# Altium PCB PCB.PcbDoc (part 2 of 2)
Units mm, origin at the board's own origin, x right, y up, seen from the top; angles counter-clockwise.
Board outline 100 x 50 mm, 4 copper layers (Top Layer, Vdd, GND, Bottom Layer), stack 0.603 mm thick; 99 components, 96 nets, 382 pads, 148 vias.
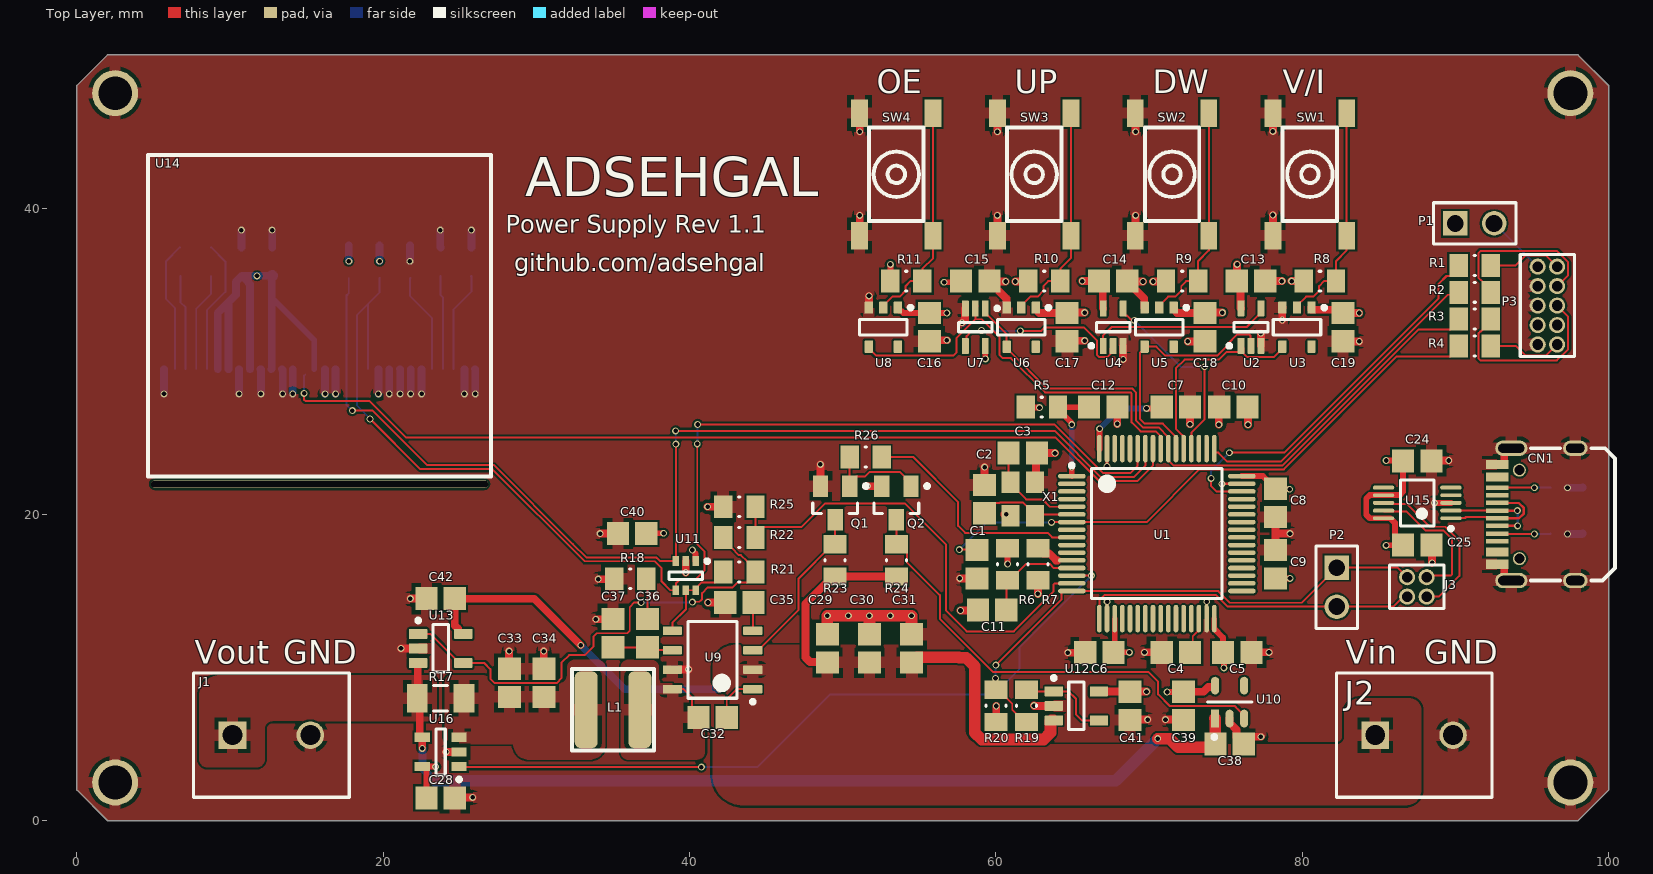
[diagram p0: Top Layer view]

## Via types
v1: diameter 0.45, hole 0.3, Top Layer to Bottom Layer, 148 vias

## Nets (pads, with @x,y where several pads share a name; then routed paths per layer and width w, separated by ;. In a path a pad name is that pad's centre, name@x,y a point inside that pad or via, vN(x,y) a via of type N, cw(c..) or ccw(c..) an arc to the next point about the centre after c; other vN are vias at no path point) (continued)
PB7: (continued)
  Top Layer w0.127: v1(19.139,26.229) 19.161,26.229 22.428,22.962 27.127,22.962 33.147,16.942 37.719,16.942 38.176,16.485 38.176,15.621 38.747,15.05 U11.4 39.113,15.063 39.113,15.491 39.332,15.71 40.322,15.71 40.983,16.37 40.983,17.564 40.5,18.047 v1(40.5,24.6) ; v1(40.526,25.87) 40.538,25.857 63.83,25.857 66.992,22.695 68.757,22.695 69.25,23.188 U1.59
  Bottom Layer w0.127: U14.20 18.995,33.727 ; v1(19.139,26.229) 19.139,26.251 18.295,27.095 U14.19 18.295,33.027 18.995,33.727 ; R12.1@19.761,35.439 R12.1 19.75,34.482 18.995,33.727 ; v1(40.5,24.6) 40.513,24.613 40.513,25.857 v1(40.526,25.87)
PB8: U1.61
PB9: U1.62
PB10: U1.29
PB12: U1.33
PB13: U1.34
PB14: U1.35
PB15: U1.36
PC0: U1.8
PC1: R26.1 U1.9 | length 15.5
  Top Layer w0.127: R26.1 54.584,23.75 57.531,20.803 57.531,19.253 57.988,18.796 63.373,18.796 63.669,18.5 U1.9
PC2: U1.10
PC3: U1.11
PC4: U1.24
PC5: U1.25
PC6: U1.37
PC7: U1.38
PC8: U1.39
PC9: U1.40
PC10: U1.51
PC11: U1.52 U4.4 | length 12.8
  Top Layer w0.127: U4.4 68.3,33.15 68.462,32.988 68.534,32.988 68.796,32.726 68.975,32.726 v1(69.037,32.664) ; U1.52 72.75,25.325 73.625,26.2 v1(73.625,29.637)
  Bottom Layer w0.127: v1(69.037,32.664) 72.064,29.637 v1(73.625,29.637)
PC12: U1.53 U2.1 U3.4 | length 13.1
  Top Layer w0.127: 72.162,25.175 71.75,25.588 71.75,29.537 72.312,30.1 74.554,30.1 75.042,30.588 75.839,30.588 76,30.749 U2.1 76.162,30.838 76.162,30.498 76.375,30.284 78.154,30.284 78.483,30.613 78.489,30.613 78.7,30.825 U3.4
PC13: U1.2
PC14: U1.3
PC15: U1.4
PD2: U1.54 U2.2 U5.4 | length 17
  Top Layer w0.127: U1.54 71.75,25.075 70.892,25.933 69.701,25.933 69.391,26.243 69.391,30.539 69.466,30.613 69.489,30.613 69.7,30.825 U5.4 70.475,30.95 71.065,30.359 74.454,30.359 75.102,31.008 75.102,31.092 75.76,31.75 76.532,31.75 76.606,31.676 76.606,31.044 U2.2
PWR_FB: R21.2 U9.5 U11.5 U11.6 | length 6.1
  Top Layer w0.127: U9.5 38.875,12.916 39.751,13.792 U11.5 U11.5 U11.6 40.4,15.175 40.788,15.563 41.663,15.563 42.2,16.1 R21.2
TPS_REG_EN: Q1.3 R23.1 U9.3 | length 11
  Top Layer w0.127: U9.3 44.475,11.135 47.117,13.777 47.117,15.817 49.35,18.05 R23.1 Q1.3
Vbat: C12.2 R5.2 U1.1 | length 7
  Top Layer w0.381: R5.2@64.05,26.85 R5.2@64.059,26.859 ; R5.2 64.059,26.991 R5.2@64.059,26.859 ; v1(64.948,23.089) 64.948,22.502 U1.1 ; v1(64.948,25.857) 64.948,25.97 R5.2@64.059,26.859 ; C12.2 64.2,27 R5.2@64.059,26.859
  Bottom Layer w0.381: v1(64.948,23.089) v1(64.948,25.857)
VCC: C38.2 J1.1 R17.1 U10.1 U13.3 U16.4 | length 62.3
  Top Layer w0.508: U13.3 22.25,10.275 22.25,8.025 R17.1 22.388,7.837 22.388,5.496 22.434,5.45 U16.4 v1(22.55,4.73)
  Top Layer w0.762: v1(70.561,5.359) 71.349,5.359 71.907,4.801 74.126,4.801 C38.2 74.312,5.013 74.312,6.662 U10.1
  Bottom Layer w0.508: v1(22.55,4.73) 22.555,4.724 22.555,3.429 23.368,2.616
  Bottom Layer w0.762: 23.368,2.616 67.818,2.616 v1(70.561,5.359)
Vref: C11.2 R6.2 U1.13 | length 6.7
  Top Layer w0.127: C11.2 60.675,15.55 60.825,15.7 60.9,15.7 61.977,16.777 63.5,16.777 63.777,16.5 U1.13
X1_1: C3.2 U1.5 X1.1 | length 6.7
  Top Layer w0.127: C3.2 60.825,22.125 61.968,20.982 63.038,20.982 63.519,20.5 U1.5
X1_2: C2.2 U1.6 X1.3 | length 6.4
  Top Layer w0.127: C2.2 59.912,20.737 60.217,20.737 60.271,20.791 61.76,20.791 62.6,19.95 62.65,20 U1.6
pads on no net: CN1.A4/B9 CN1.A8 CN1.B4/A9 CN1.B8 CN1.H1 CN1.H2 P3.7 P3.8 U3.5 U5.5 U6.5 U8.5 U10.4 U14.31 U15.4 U15.5 U15.6

## Polygon pours and split planes (outlines as drawn)
GND on Top Layer "GND_L01_P004" (solid, pour order 4): 2,50 98,50 100,48 100,2 98,0 2,0 0,2 0,48
+12 on Top Layer "Vcc" (solid, pour order 3): 87,8 cw(c87,7.25) 87.75,7.25 87.75,2 cw(c86.75,2) 86.75,1 43.5,1 cw(c43.5,3) 41.5,3 41.5,10 cw(c43,10) 43,11.5 56,11.5 cw(c56,9.5) 58,9.5 58,6 ccw(c59,6) 59,5 81.5,5 82.25,5 ccw(c82.25,5.5) 82.75,5.5 82.75,7 cw(c83.75,7) 83.75,8 85.5,8
VCC on Top Layer "VCC_L01_P000" (solid, pour order 0): 11.098,3.51 11.107,3.5 11.75,3.5 ccw(c11.75,4) 12.25,4 12.25,6 cw(c12.75,6) 12.75,6.5 23,6.5 ccw(c23,7) 23.5,7 23.5,9 ccw(c23,9) 23,9.5 9.296,9.5 ccw(c9.296,8.204) 8,8.204 8,4 ccw(c8.5,4) 8.5,3.5 11,3.5 ccw(c11,4)
NetC33_2 on Top Layer "NETC33_2_L01_P001" (solid, pour order 1): 26.5,9.5 cw(c26.5,9) 27,9 31.5,9 ccw(c31.5,9.5) 32,9.5 32,10 cw(c32.5,10) 32.5,10.5 34,10.5 cw(c34,10) 34.5,10 34.5,5 cw(c33.5,5) 33.5,4 29.5,4 cw(c29.5,5) 28.5,5 24.5,5 cw(c24.5,5.5) 24,5.5 24,9 cw(c24.5,9) 24.5,9.5
NetC32_2 on Top Layer "NETC32_2_L01_P002" (solid, pour order 2): 38,9.25 ccw(c38.25,9.25) 38.25,9 40.5,9 cw(c40.5,8.5) 41,8.5 41,4.5 cw(c40.5,4.5) 40.5,4 36,4 cw(c35.999,4.499) 35.5,4.5 35.5,10 cw(c36,10) 36,10.5 37.5,10.5 cw(c37.501,10.001) 38,10
GND on Bottom Layer "GND_L04_P005" (solid, pour order 5): 0,48 2,50 98,50 100,48 100,2 98,0 2,0 0,2
+3v3 on Vdd (split plane): 99.49,47.789 99.49,2.211 97.789,0.51 2.211,0.51 0.51,2.211 0.51,47.789 2.211,49.49 97.789,49.49
GND on GND (split plane): 99.49,47.789 99.49,2.211 97.789,0.51 2.211,0.51 0.51,2.211 0.51,47.789 2.211,49.49 97.789,49.49

## Silkscreen, mask and mechanical layers (free items; w line width, h text height)
Top Overlay:
  text "OE" at 52.23,47.504 h1.52
  text "UP" at 61.23,47.504 h1.52
  text "DW" at 70.23,47.504 h1.52
  text "V/I" at 78.723,47.504 h1.52
  text "ADSEHGAL" at 29.266,40.762 h2.54
  text "Power Supply Rev 1.1" at 27.99,38.385 h1.14
  text "github.com/adsehgal" at 28.562,35.885 h1.14
  text "Vout" at 7.711,10.254 h1.52
  text "GND" at 13.469,10.254 h1.52
  text "Vin" at 82.846,10.254 h1.52
  text "GND" at 87.969,10.254 h1.52